# Altium PCB clockPCB.PcbDoc
Units mil, origin at the board's own origin, x right, y up, seen from the top; angles counter-clockwise.
Board outline 2380 x 1360 mil, 2 copper layers (Top Layer, Bottom Layer), stack 61.855 mil thick; 42 components, 40 nets, 156 pads, 15 vias.
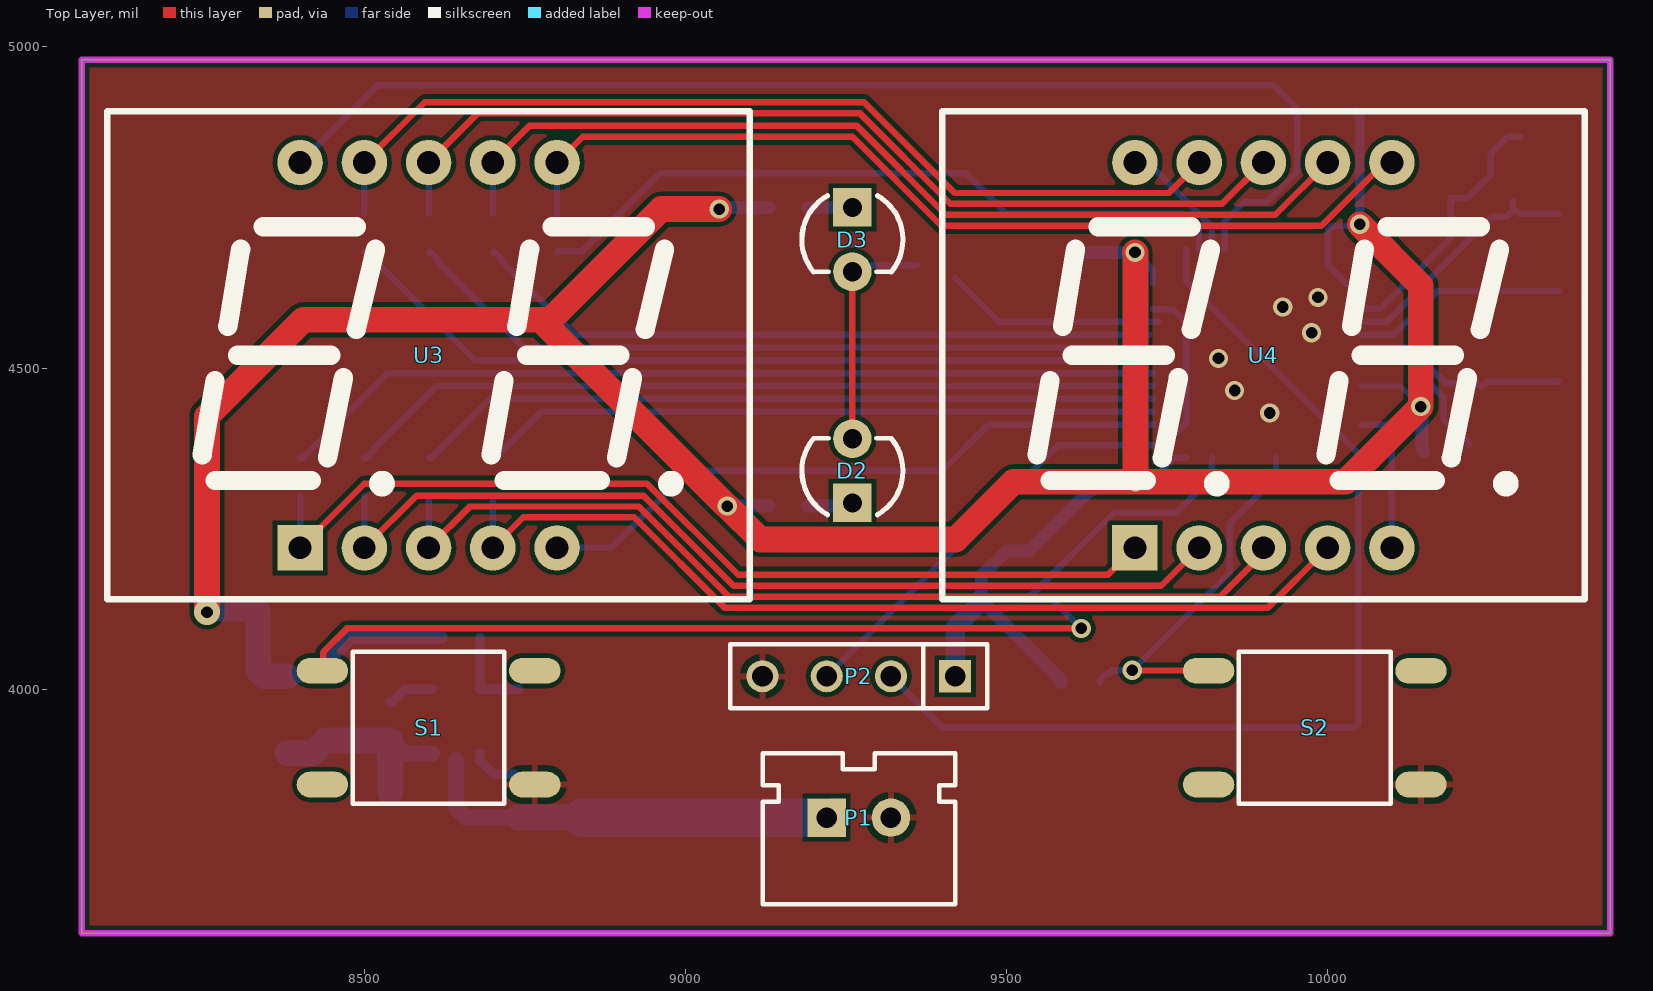
[diagram p0: Top Layer view]
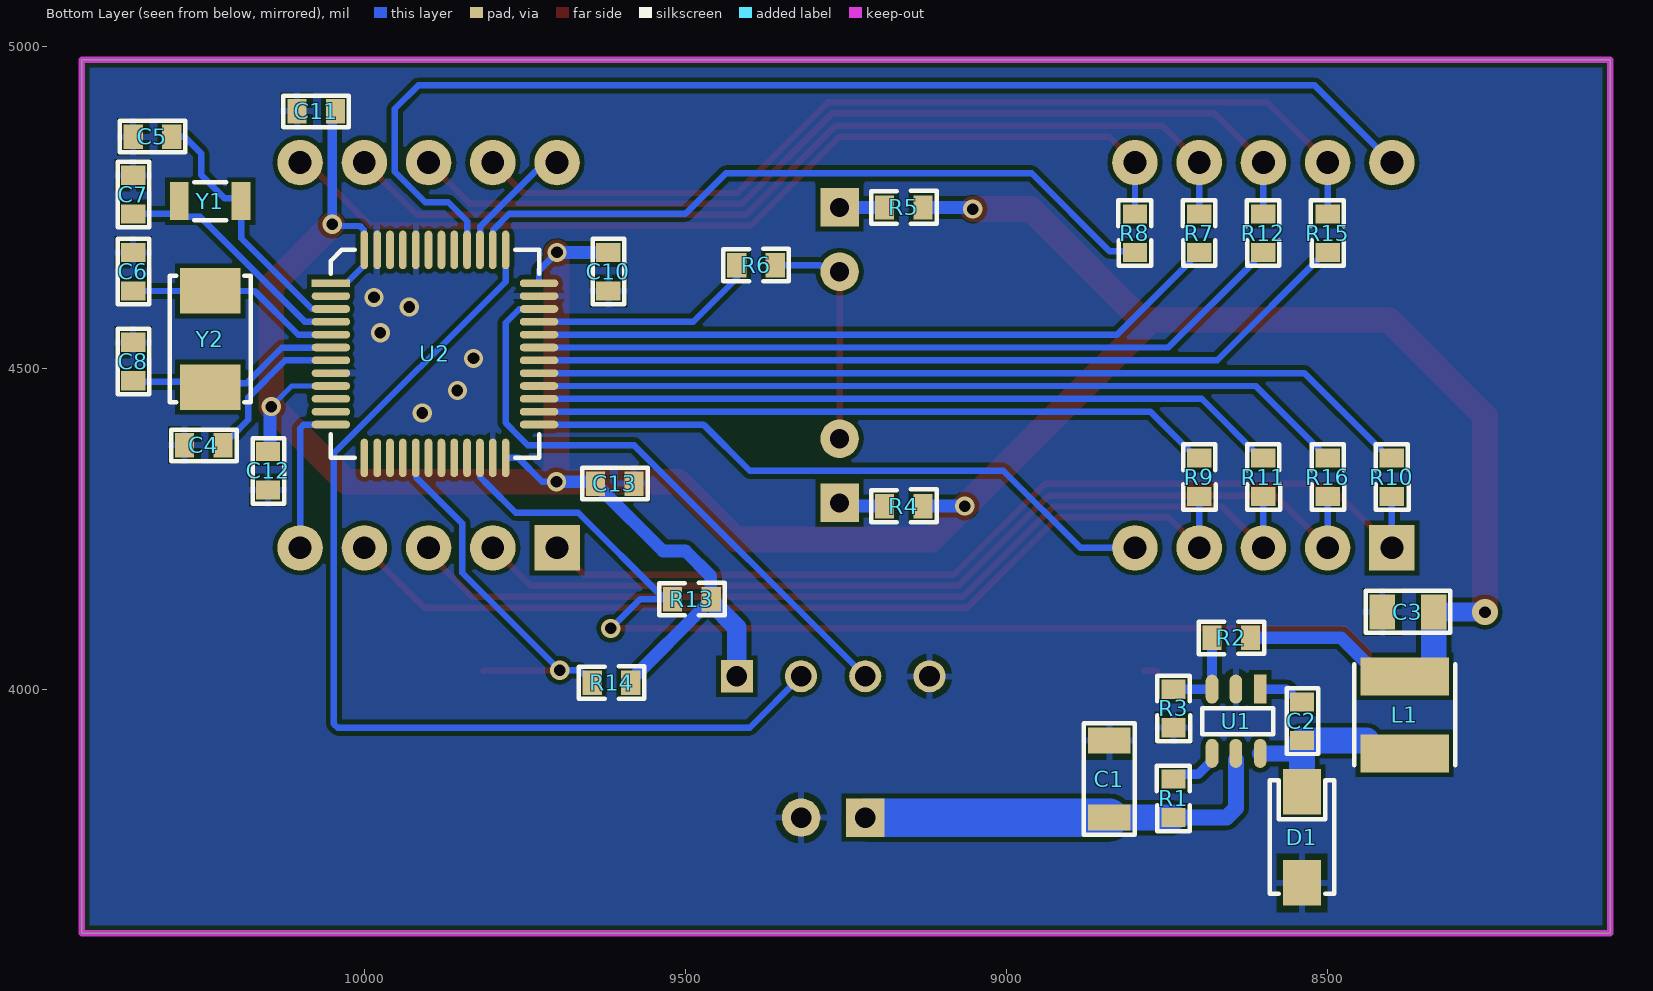
[diagram p1: Bottom Layer view, seen from below]
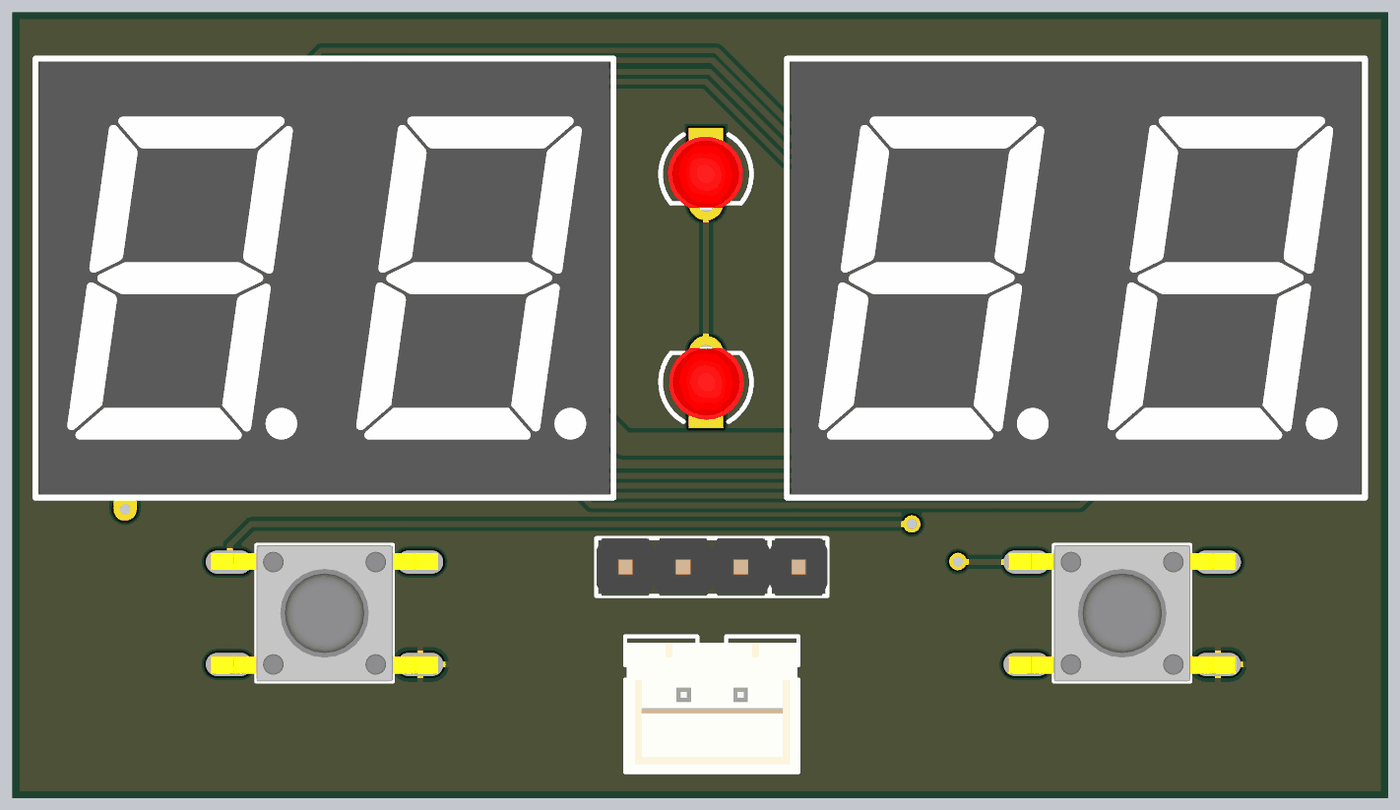
[diagram p2: 3D render of the assembled board from above, using the file's embedded part models]
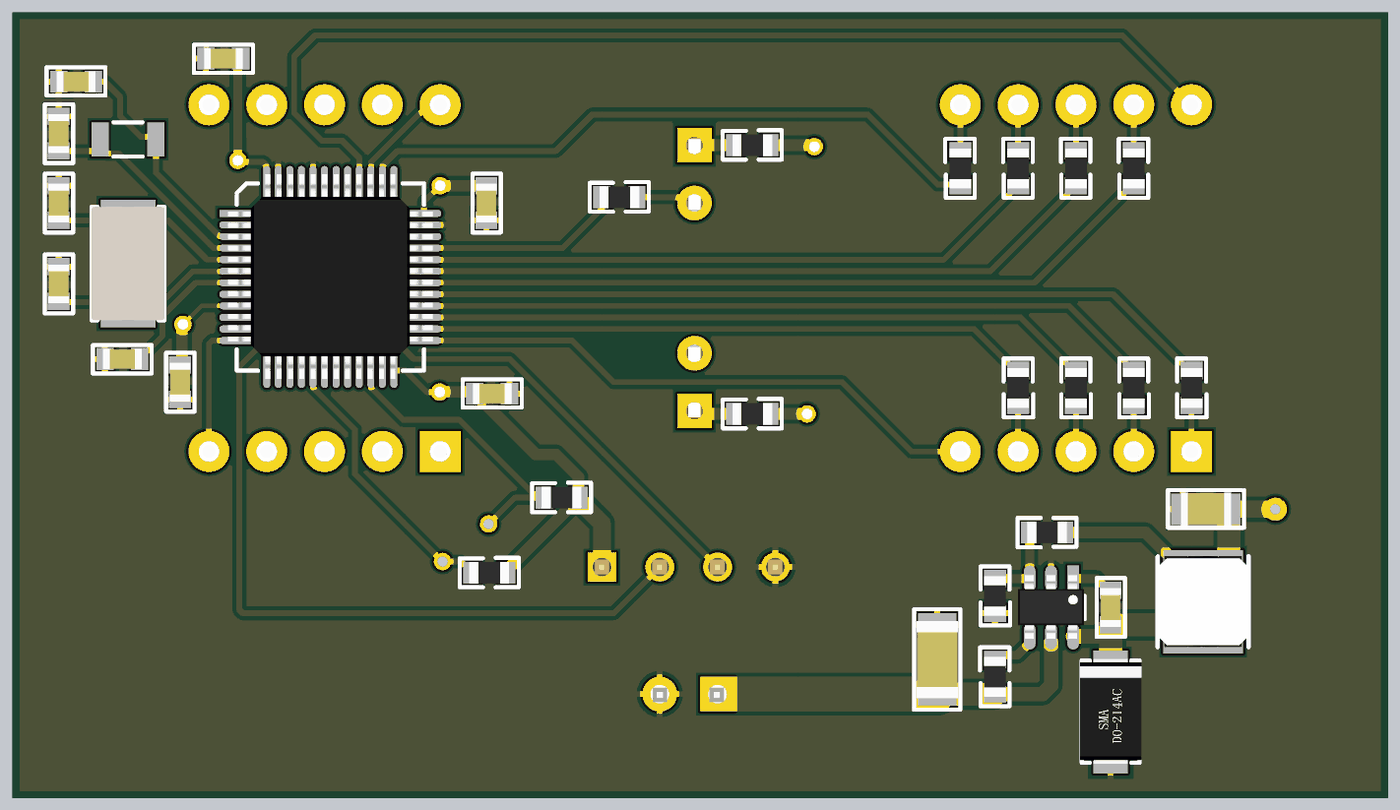
[diagram p3: 3D render of the assembled board from below, using the file's embedded part models]

## Layer stack, top to bottom
Top Solder: solder mask 0.4, Solder Resist, Dk 3.5
Top Layer: signal copper 1.4
Dielectric 1: dielectric 59.0551, FR-4, Dk 4.8
Bottom Layer: signal copper 1.4
Bottom Solder: solder mask 0.4, Solder Resist, Dk 3.5

## Board outline
8060,3620 10440,3620 10440,4980 8060,4980

## Design rules (kind name [scope] priority, off if disabled: settings)
Clearance [All] p1: gap=7 ignorepadtopadclearanceinfootprint=FALSE
MinimumSolderMaskSliver [All] p1 off: minsoldermaskwidth=10
PolygonConnect PolygonConnect_1 [((InPadClass('All Pads')))] p1: connectstyle=Relief reliefconductorwidth=10 reliefentries=4 polygonreliefangle="90 Angle" airgapwidth=10
PolygonConnect [All] p2: connectstyle=Direct reliefconductorwidth=10 reliefentries=4 polygonreliefangle="90 Angle" airgapwidth=10
RoutingVias [All] p1: holewidth=28 width=50 viastyle="Through Hole" minholewidth=28 minwidth=50 maxholewidth=28 maxwidth=50
SilkToSilkClearance [All] p1 off: silktosilkclearance=10
SilkToSolderMaskClearance [IsPad] p1 off: minsilkscreentomaskgap=10 clearancetoexposedcopper=TRUE
SolderMaskExpansion [All] p1: expansion=4 istentingtop=FALSE
Width [All] p1: maxlimit=1000 minlimit=7 preferedwidth=10
27 further rules are at their usual default settings.

## Components (designator, comment, footprint, x,y, rotation, side; value= is the part's Value field where it differs from the comment)
C1 "475" C1206 8840,3920 r270 bottom
C2 "103" C0603 8540,3920 r90 bottom
C3 "226" C0805 8415,4120 r180 bottom
C4 "104" C0603 10280,4380 r180 bottom
C5 "15p" C0603 10300,4860 r0 bottom
C6 "15p" C0603 10360,4620 r90 bottom
C7 "15p" C0603 10360,4740 r90 bottom
C8 "15p" C0603 10360,4480 r90 bottom
C10 "104" C0603 9620,4620 r90 bottom
C11 "104" C0603 10105,4900 r180 bottom
C12 "104" C0603 10150,4310 r90 bottom
C13 "104" C0603 9580,4320 r0 bottom
D1 "B230A" SMA 8540,3698.27 r90 bottom
D2 "RED" LED3MM-RED 9260,4340 r90 top
D3 "RED" LED3MM-RED 9260,4700 r270 top
L1 "" L4X4 8380,3900 r90 bottom value=4μ7H
P1 "Header 2" XH2P54P2 9220,3800 r90 top locked
P2 "Header 4" SIP4 9420,4020 r180 top
R1 "" R0603 8740,3800 r90 bottom value=100K
R2 "" R0603 8620,4080 r0 bottom value=49K9
R3 "" R0603 8740,4000 r270 bottom value=16K2
R4 "" R0603 9190,4285 r180 bottom value=360R
R5 "" R0603 9190,4750 r180 bottom value=360R
R6 "" R0603 9420,4660 r180 bottom value=360R
R7 "" R0603 8700,4680 r90 bottom value=360R
R8 "" R0603 8800,4680 r90 bottom value=360R
R9 "" R0603 8700,4360 r270 bottom value=360R
R10 "" R0603 8400,4360 r270 bottom value=360R
R11 "" R0603 8600,4360 r270 bottom value=360R
R12 "" R0603 8600,4680 r90 bottom value=360R
R13 "" R0603 9520,4140 r180 bottom value=1K
R14 "" R0603 9645,4010 r180 bottom value=1K
R15 "" R0603 8500,4680 r90 bottom value=360R
R16 "" R0603 8500,4360 r270 bottom value=360R
S1 "KE6X6" KE6X6-SMT 8600,3940 r270 top
S2 "KE6X6" KE6X6-SMT 9980,3940 r270 top
U1 "MP2359" SOT23-6 8605.2,3999.83 r270 bottom
U2 "STM32F103C8Tx" PQFP48 10051.83,4631.8 r180 bottom
U3 "SN450401N" "SMG 0.56-2P" 8600,4520 r0 top locked
U4 "SN450401N" "SMG 0.56-2P" 9900,4520 r0 top locked
Y1 "32768" FC-135 10240,4760 r180 bottom
Y2 "8M" CY5032 10240,4470.39 r90 bottom

## Footprints (in the part's own frame and the unit in brackets; to place one, negate y for a bottom-side part, rotate by r counter-clockwise, add the part's x,y. Pads: shape width x height; smd on the part's side, far side on the other; paste and mask are expansions set on the pad)
C0603 [mil]
  rect 30x38 smd: 1(0,0) 2(60,0)
  silkscreen extent -21,-25 81,24, body extent -3,-18 63,18, height 35
C0805 [mil]
  rect 40x54 smd: 1(0,0) 2(80,0)
  silkscreen extent -26,-32 106,33, body extent -3,-29 83,29, height 53
C1206 [mil]
  rect 40x66 smd: 1(0,0) 2(120,0)
  silkscreen extent -27,-40 147,40, body extent -7,-35 127,35, height 39
CY5032 [mm]
  rect 1.8x2.4 smd: 1(0,0) 2(3.8,0)
  silkscreen extent -0.6,-1.6 4.4,1.6, body extent -0.59,-1.6 4.41,1.6, height 1.23
FC-135 [mm]
  rect 0.75x1.5 smd: 1(-1.225,0) 2(1.225,0)
  silkscreen extent -0.64,-0.75 0.64,0.75, body extent -1.6,-0.75 1.6,0.75
KE6X6-SMT [mil]
  oval 40x80 smd: 1(88.58,-165.35) 2(88.58,165.35) 3(-88.58,165.35) 4(-88.58,-165.35)
  silkscreen extent -118,-118 118,118, body extent -118,-197 118,197, height 256
L4X4 [mm]
  rect 1.5x3.5 smd: 1(0,0) 2(3.048,0)
  silkscreen extent -0.48,-2 3.52,2, body extent -0.48,-2 3.52,2, height 1.02
LED3MM-RED [mil]
  rect 60x60 hole 30: 1(-50,0)
  round 60 hole 30: 2(50,0)
  silkscreen extent -68,-79 50,79, body extent -65,-66 61,64, height 184
PQFP48 [mil]
  rect 60x12 smd: 1(-0.17,0.2)
  oval 60x12 smd: 2(-0.17,-19.8) 3(-0.17,-39.8) 4(-0.17,-59.8) 5(-0.17,-79.8) 6(-0.17,-99.8) 7(-0.17,-119.8) 8(-0.17,-139.8) 9(-0.17,-159.8) 10(-0.17,-179.8) 11(-0.17,-199.8) 12(-0.17,-219.8) 25(323.83,-219.8) 26(323.83,-199.8) 27(323.83,-179.8) 28(323.83,-159.8) 29(323.83,-139.8) 30(323.83,-119.8) 31(323.83,-99.8) 32(323.83,-79.8) 33(323.83,-59.8) 34(323.83,-39.8) 35(323.83,-19.8) 36(323.83,0.2)
  oval 12x60 smd: 13(51.83,-271.8) 14(71.83,-271.8) 15(91.83,-271.8) 16(111.83,-271.8) 17(131.83,-271.8) 18(151.83,-271.8) 19(171.83,-271.8) 20(191.83,-271.8) 21(211.83,-271.8) 22(231.83,-271.8) 23(251.83,-271.8) 24(271.83,-271.8) 37(271.83,52.2) 38(251.83,52.2) 39(231.83,52.2) 40(211.83,52.2) 41(191.83,52.2) 42(171.83,52.2) 43(151.83,52.2) 44(131.83,52.2) 45(111.83,52.2) 46(91.83,52.2) 47(71.83,52.2) 48(51.83,52.2)
  silkscreen extent 0,-272 324,52, body extent -15,-286 339,68, height 57
R0603 [mil]
  rect 30x38 smd: 1(0,0) 2(60,0)
  silkscreen extent -21,-25 81,26, body extent -4,-19 64,19, height 22
SIP4 [mil]
  rect 50x50 hole 32: 1(0,0)
  round 50 hole 32: 2(100,0) 3(200,0) 4(300,0)
  silkscreen extent -50,-50 350,50, body extent -50,-50 350,50, height 337
SMA [mm]
  rect 1.8x1.5 smd: 1(0,0) 2(3.6,0)
  silkscreen extent -0.43,-1.27 4.07,1.27, body extent -0.47,-1.35 4.13,1.35, height 2.4
"SMG 0.56-2P" [mm] "25*19*8mm(长宽厚)"
  rect 1.8x1.8 hole 0.9: 1(-5.08,-7.62)
  round 1.8 hole 0.9: 2(-2.54,-7.62) 3(0,-7.62) 4(2.54,-7.62) 5(5.08,-7.62) 6(5.08,7.62) 7(2.54,7.62) 8(0,7.62) 9(-2.54,7.62) 10(-5.08,7.62)
  silkscreen extent -12.7,-9.65 12.7,9.65, body extent -12.5,-9.5 12.5,9.5, height 8
SOT23-6 [mil]
  rect 45x20 smd: 1(-0.17,0.2)
  oval 45x20 smd: 2(-0.17,-37.8) 3(-0.17,-74.8) 4(99.83,-74.8) 5(99.83,-37.8) 6(99.83,0.2)
  silkscreen extent 30,-90 70,20, body extent -6,-95 104,19, height 57
XH2P54P2 [mil]
  rect 60x60 hole 32: 1(0,0)
  round 60 hole 32: 2(0,-100)
  silkscreen extent -135,-200 100,100, body extent -135,-198 89,97, height 276

## Part data
C1 C2 C3 C4 C5 C6 C7 C8 C10 C11 C12 C13: library part Cap, "Capacitor", LatestRevisionDate=17-Jul-2002, LatestRevisionNote="Re-released for DXP Platform.", PackageDescription="Radial Cap, Thru-Hole; 2 Leads; 0.3 in Pin Spacing", PackageReference=RAD-0.3, Published=8-Jun-2000, Publisher="Altium Limited"
D1: library part "Diode BAS70", "Silicon AF Schottky Diode for High-Speed Switching", ComponentLink1Description="Manufacturer Link", ComponentLink1URL=http://www.infineon.com/, ComponentLink2Description=Datasheet, ComponentLink2URL=http://www.infineon.com/upload/Document/cmc_upload/documents/009/382/bas40_bas140series_1.pdf, DatasheetVersion=Oct-1999, LatestRevisionDate=29-May-2009, LatestRevisionNote="IPC-7351 Footprint Added.", Note="Pin 2 is not connected and not drawn.", PackageDescription="3-Pin SOT-23 Package 0.95 mm Pitch, 2.5 mm Lead Span", PackageReference=SOT-23, PackageVersion=Sep-2001, Published=21-Mar-2003, Publisher="Altium Limited"
D2 D3: library part LED0, "Typical INFRARED GaAs LED", LatestRevisionDate=08-Jul-2005, LatestRevisionNote="Mech Layer 1 removed.", PackageDescription="LED; 2 Leads", PackageReference=LED-0, Published=8-Jun-2000, Publisher="Altium Limited"
L1: library part Inductor, Code_IEC=1005, Code_JEITA=0402, LatestRevisionDate=29-May-2009, LatestRevisionNote="IPC-7351 Footprint Added.", PackageDescription="Chip Inductor", PackageReference=0402-A, Published=8-Jun-2000, Publisher="Altium Limited"
P1: library part "Header 2H", "Header, 2-Pin, Right Angle", LatestRevisionDate=17-Jul-2002, LatestRevisionNote="Re-released for DXP Platform.", Publisher="Altium Limited"
P2: "Header, 4-Pin", LatestRevisionDate=17-Jul-2002, LatestRevisionNote="Re-released for DXP Platform.", Publisher="Altium Limited"
R1 R2 R3 R4 R5 R6 R7 R8 R9 R10 R11 R12 R13 R14 R15 R16: library part Res2, "Resistor", LatestRevisionDate=17-Jul-2002, LatestRevisionNote="Re-released for DXP Platform.", PackageDescription="Axial Device, Thru-Hole; 2 Leads; 0.4 in Pin Spacing", PackageReference=AXIAL-0.4, Published=8-Jun-2000, Publisher="Altium Limited"
S1 S2: library part KE6X6-SMT
Y1 Y2: library part XTAL, "Crystal Oscillator", LatestRevisionDate=17-Jul-2002, LatestRevisionNote="Re-released for DXP Platform.", PackageDescription="Crystal, Thru-Hole; 2 Leads; Body 3.1 x 8.2 mm (Dia.xH)", PackageReference=R38, Published=8-Jun-2000, Publisher="Altium Limited"

## Via types
v1: diameter 30, hole 18, Top Layer to Bottom Layer, 14 vias
v2: diameter 40, hole 18, Top Layer to Bottom Layer, 1 vias

## Nets (pads, with @x,y where several pads share a name; then routed paths per layer and width w, separated by ;. In a path a pad name is that pad's centre, name@x,y a point inside that pad or via, vN(x,y) a via of type N, cw(c..) or ccw(c..) an arc to the next point about the centre after c; other vN are vias at no path point)
3V3: C3.2 C10.2 C11.2 C12.2 C13.2 L1.2 P2.1 R2.1 R4.2 R5.2 R13.2 R14.2 U2.1 U2.9 U2.24 U2.36 U2.48 | length 5563.8
  Top Layer w40: v2(8255,4120) 8255,4425 8405,4575 8775,4575 8790,4575 8962.5,4747.5 v1(9052.52,4747.48) ; 8774.41,4575 9064.41,4285 v1(9065,4285) 9117,4233 9421.05,4233 9510.88,4322.83 v1(9700.79,4322.83) ; v1(9700,4680) 9700.79,4679.21 v1(9700.79,4322.83) ; v1(10049.93,4723.71) 10145,4628.64 v1(10145,4440) 10027.83,4322.83 v1(9700.79,4322.83)
  Bottom Layer w8: U2.9 10113,4472 v1(10145,4440)
  Bottom Layer w10: v1(9700,4680) 9728,4652 U2.36 ; v1(9700.79,4322.83) 9722.83,4322.83 9760,4360 U2.24 ; v1(10049.93,4723.71) 10049.93,4722.41 10051.17,4721.17 10006.86,4721.17 10001,4715.32 10001,4709.54 10000,4708.54 U2.48 10000,4660 10028,4632 U2.1
  Bottom Layer w15: C11.2 10050.07,4894.93 10050.07,4762.57 ; v1(10049.93,4723.71) 10049.93,4762.57
  Bottom Layer w20: L1.2 8419.37,4020 8479.37,4080 R2.1 ; v1(9052.52,4747.48) 9055.03,4750 R5.2 ; v1(9065,4285) R4.2 ; R13.2@9460,4136 9465,4131 9468,4131 9585,4014 R14.2 ; R13.2 9460.71,4140.71 9460.71,4175.71 9500,4215 9535,4215 9631,4311 9635,4311 9640,4316 C13.2 9642.83,4322.83 v1(9700.79,4322.83) ; C10.2 v1(9700,4680) ; v1(10145,4440) 10146.91,4438.09 10146.91,4373.09 C12.2
  Bottom Layer w30: v2(8255,4120) C3.2 ; P2.1 9420,4096 9460,4136 R13.2
  Bottom Layer w40: C3.2 8335,4029.53 8344.53,4020 L1.2
A: R7.1 U2.32 | length 1077.4
  Bottom Layer w10: R7.1 8704,4680 8714,4670 8714,4666 8828.02,4551.98 U2.32@9722.02,4551.98
B: R8.1 U2.38 | length 1118
  Bottom Layer w10: R8.1 8802.09,4682.09 8839.57,4682.09 8960.63,4803.15 9436.85,4803.15 9500,4740 9774.14,4740 9799.62,4714.52 9799.62,4684.38 U2.38
C: R9.1 U2.26 | length 1057.8
  Bottom Layer w10: R9.1 8704,4360 8776,4432 U2.26
D: R10.1 U2.29 | length 1382.7
  Bottom Layer w10: R10.1 8404,4360 8536,4492 U2.29
E: R11.1 U2.27 | length 1166.1
  Bottom Layer w10: R11.1 8604,4360 8696,4452 U2.27
F: R12.1 U2.31 | length 1191.6
  Bottom Layer w10: R12.1 8604,4680 8614,4670 8614,4666 8748,4532 U2.31
G: R15.1 U2.30 | length 1297.6
  Bottom Layer w10: R15.1 8504,4680 8672,4512 U2.30
GND: C1.1 C3.1 C4.1 C5.2 C6.2 C7.2 C8.2 C10.1 C11.1 C12.1 C13.1 D1.1 P1.2 P2.4 R3.2 S1.2 S2.2 U1.2 U2.8 U2.23 U2.35 U2.44 U2.47
  other v1: 9910,4430 9855,4465 9830,4515 9975,4555 9930,4595 9985,4610
K1: U2.40 U3.10 | length 1904.4
  Bottom Layer w10: U3.10 8520,4940 9916.3,4940 9952.57,4903.73 9952.57,4805.49 9905.01,4757.93 9869.54,4757.93 9840,4728.39 U2.40
K2: U2.25 U3.5 | length 1007.5
  Bottom Layer w10: U3.5 8885,4220 9005,4340 9400,4340 9472,4412 U2.25
K3: U2.39 U4.10 | length 197.4
  Bottom Layer w10: U4.10 9709.71,4810.29 9729.71,4810.29 9819.62,4720.38 9819.62,4684.38 U2.39
K4: U2.12 U4.5 | length 236.6
  Bottom Layer w10: U2.12 10094.14,4412 10100,4406.14 U4.5
KEY0: R13.1 S1.4 U2.22 | length 1732.4
  Top Layer w10: S1.4 8436.13,4030.06 8436.13,4057.72 8472.89,4094.49 v1(9616.14,4094.49)
  Bottom Layer w10: R13.1 9570.63,4140 v1(9616.14,4094.49) ; R13.1@9534.88,4142.72 9666.77,4274.61 9764.06,4274.61 9807.46,4318 9819.62,4330.16 9819.62,4359.62 U2.22
KEY1: R14.1 S2.4 U2.17 | length 603.8
  Top Layer w10: v1(9695.87,4029.53) 9696.34,4029.06 9814.17,4029.06 S2.4
  Bottom Layer w10: R14.1 9645,4014 9655,4024 9659,4024 9664.53,4029.53 v1(9695.87,4029.53) 9847.43,4181.09 9847.43,4257.98 9919.62,4330.16 9919.62,4359.62 U2.17
NetC2_1: C2.1 D1.2 L1.1 U1.6 | length 323.2
  Bottom Layer w25: C2.1 8544,3920 8546.5,3917.5 8546.5,3914.64 8561.14,3900 U1.6
  Bottom Layer w40: L1.1 8419.37,3900 8439.37,3920 C2.1 D1.2
NetC2_2: C2.2 U1.1 | length 73.3
  Bottom Layer w15: C2.2 8544,3980 8564,4000 U1.1
NetC4_2: C4.2 U2.7 | length 245.5
  Bottom Layer w10: U2.7 10123,4512 10180.76,4454.24 10180.76,4419.24 10206,4394 10210,4394 10220,4384 C4.2
NetD2_1: D2.1 R4.1 | length 72.1
  Bottom Layer w20: R4.1 9255,4285 D2.1
NetD2_2: D2.2 D3.2 R6.2 | length 364.1
  Top Layer w10: D2.2 D3.2
  Bottom Layer w10: D3.2 9269.57,4659.57 9290.42,4659.57 9290.86,4660 R6.2
NetD3_1: D3.1 R5.1 | length 70
  Bottom Layer w20: R5.1 D3.1
NetR1_2: R1.2 U1.4 | length 87.1
  Bottom Layer w15: U1.4 8680,3888.85 8701.35,3867.5 8732.5,3867.5 R1.2 R1.2@8736,3860
NetR2_2: R2.2 R3.1 U1.3 | length 140
  Bottom Layer w15: R2.2 U1.3 R3.1
NetR7_2: R7.2 U3.7 U4.7 | length 1494.7
  Top Layer w10: U3.7 8757,4877 9267.04,4877 9405.47,4738.57 9918.57,4738.57 U4.7
  Bottom Layer w10: R7.2 U3.7
NetR8_2: R8.2 U3.6 U4.6 | length 1494.7
  Top Layer w10: U3.6 8840,4860 9260,4860 9398.43,4721.57 9990.27,4721.57 10088.7,4820 U4.6
  Bottom Layer w10: R8.2 U3.6
NetR9_2: R9.2 U3.4 U4.4 | length 1496.3
  Top Layer w10: U3.4 8747.43,4267.43 8920.44,4267.43 9060.88,4127 9907,4127 U4.4
  Bottom Layer w10: U3.4 R9.2
NetR10_2: R10.2 U3.1 U4.1 | length 1497.6
  Top Layer w10: U3.1 8500,4320 8940,4320 9082,4178 9658,4178 U4.1
  Bottom Layer w10: U3.1 R10.2
NetR11_2: R11.2 U3.3 U4.3 | length 1501.3
  Top Layer w10: U3.3 8664.43,4284.43 8927.48,4284.43 9067.92,4144 9832.43,4144 9900,4211.57 U4.3
  Bottom Layer w10: U3.3 R11.2
NetR12_2: R12.2 U3.8 U4.8 | length 1497.2
  Top Layer w10: U3.8 8677,4897 9271.08,4897 9412.52,4755.57 9835.57,4755.57 U4.8
  Bottom Layer w10: R12.2 U3.8
NetR15_2: R15.2 U3.9 U4.9 | length 1497.2
  Top Layer w10: U3.9 8594,4914 9278.12,4914 9419.56,4772.57 9752.57,4772.57 U4.9
  Bottom Layer w10: R15.2 U3.9
NetR16_2: R16.2 U3.2 U4.2 | length 1496.3
  Top Layer w10: U3.2 8581.43,4301.43 8934.53,4301.43 9074.96,4161 9741,4161 U4.2
  Bottom Layer w10: U3.2 R16.2
OSC32_IN: C5.1 U2.3 Y1.2 | length 414.9
  Bottom Layer w10: U2.3 10052.38,4592.38 10081.84,4592.38 10191.77,4702.32 10191.77,4764.39 10217.79,4764.39 10254,4800.6 10254,4834 10280,4860 C5.1
OSC32_OUT: C7.1 U2.4 Y1.1 | length 408.5
  Bottom Layer w10: U2.4 10052.38,4572.38 10092.74,4572.38 10255.82,4735.47 10278.46,4735.47 10288.23,4745.24 Y1.1 ; Y1.1@10288.23,4759.66 10288.23,4749.76 10297.99,4740 C7.1
OSC_IN: C6.1 U2.5 Y2.2 | length 336.2
  Bottom Layer w10: U2.5 10103.15,4552 10171.15,4620 Y2.2 C6.1
OSC_OUT: C8.1 U2.6 Y2.1 | length 337.5
  Bottom Layer w10: U2.6 10052.38,4531.62 10128.38,4531.62 10183.61,4476.39 10234.01,4476.39 Y2.1 10247.95,4478.35 10358.35,4478.35 C8.1
P: R16.1 U2.28 | length 1276.7
  Bottom Layer w10: R16.1 8504,4360 8514,4370 8514,4374 8612,4472 U2.28
POINT: R6.1 U2.33 | length 344.4
  Bottom Layer w10: 9420,4640 9488,4572 U2.33@9736.23,4572
SWCLK: P2.2 U2.37 | length 1611.9
  Bottom Layer w10: P2.2 9400,3940 10041.58,3940 10047.43,3945.86 10047.43,4367.11 9780,4634.54 U2.37
SWDIO: P2.3 U2.34 | length 940.3
  Bottom Layer w10: P2.3 9580,4380 9745.46,4380 9759.46,4394 9780,4414.54 9780,4570.54 9758.93,4591.62 9728.38,4591.62 U2.34
VCC: C1.2 P1.1 R1.1 U1.5 | length 658.4
  Bottom Layer w25: U1.5@8643,3890 8643,3814.64 8657.64,3800 R1.1
  Bottom Layer w40: R1.1 C1.2
  Bottom Layer w60: C1.2 P1.1
pads on no net: S1.1 S1.3 S2.1 S2.3 U2.2 U2.10 U2.11 U2.13 U2.14 U2.15 U2.16 U2.18 U2.19 U2.20 U2.21 U2.41 U2.42 U2.43 U2.45 U2.46
copper on no net: | length 20
  Top Layer w10: 8765.35,4028.58 8785.35,4028.58

## Polygon pours and split planes (outlines as drawn)
GND on Bottom Layer "GND_L02_P015" (solid, remove dead copper, pour order 15): 8060,4980 8060.04,4979.96 8060.04,3620.08 10438.98,3620.08 10439.96,3621.06 10439.96,4979.33
no net on Bottom Layer "NONET_L02_P014" (solid, remove dead copper, pour order 14): 8055.12,4971.46
GND on Bottom Layer "GND_L02_P006" (solid, pour order 6): 8060,4980
GND on Bottom Layer "GND_L02_P005" (solid, pour order 5): 10550,4810
GND on Top Layer "GND_L01_P016" (solid, remove dead copper, pour order 16): 8060.04,4979.33 8060.04,3620.08 8062.01,3618.11 10440.94,3618.11 10440.94,4979.33 10439.96,4980.31
no net on Top Layer "NONET_L01_P009" (solid, remove dead copper, pour order 9): 8060.04,4979.33

## Keep-outs
Keep-Out Layer:
  the board outline again, w10